# EAGLE board MotorShieldAlternate (EAGLE 7.5.0)
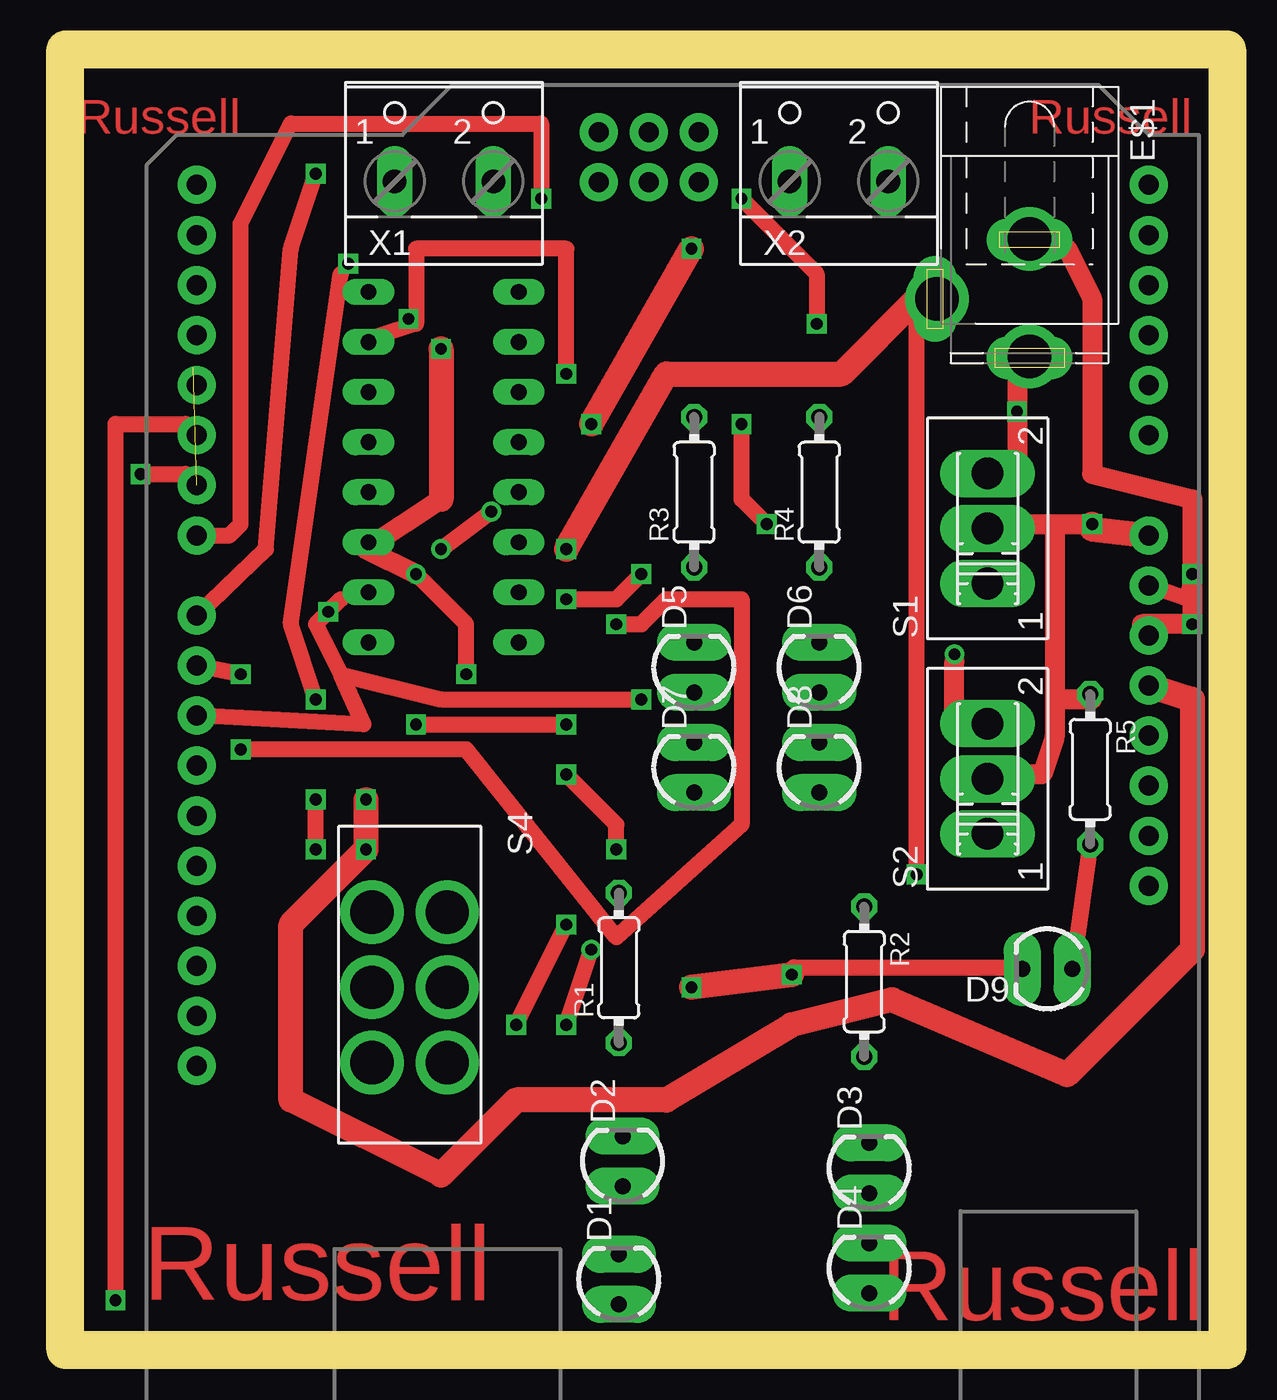
[diagram p0: board, top side]
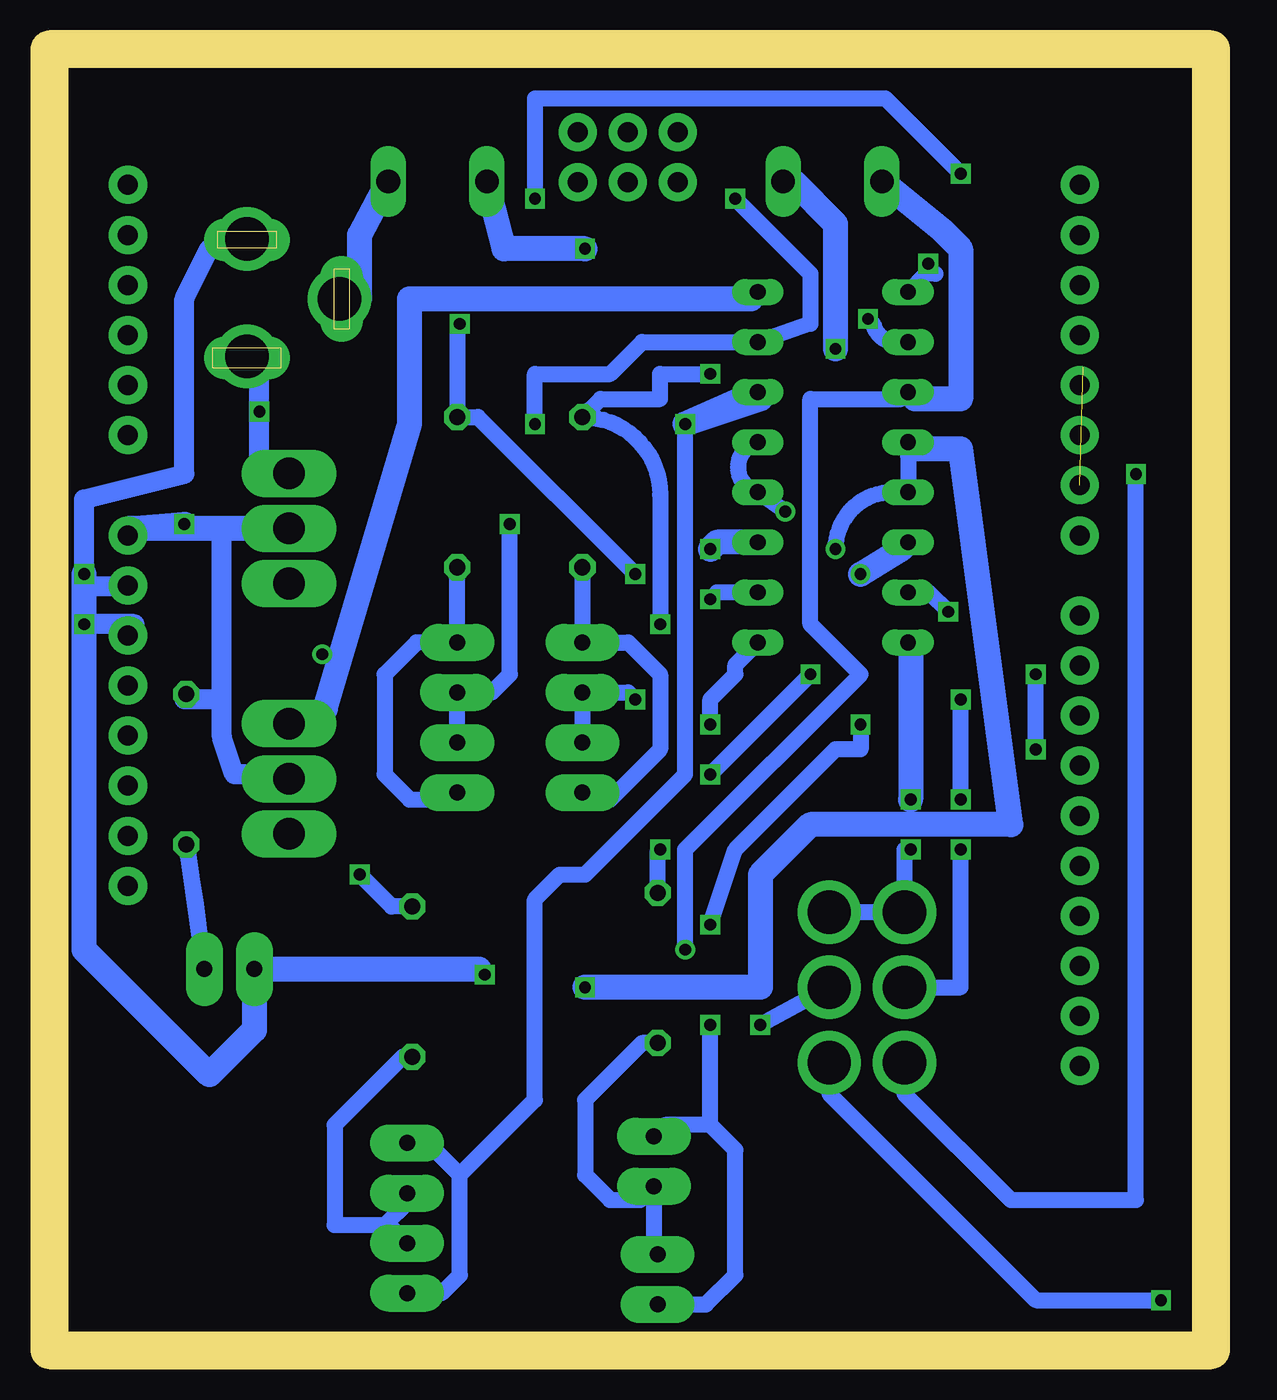
[diagram p1: board, bottom side, seen from below]

Size 58.92 x 66 mm. Coordinates in mm from the lower left corner, seen from the top.
Outline: 0,0 0,66 58.92,66 58.92,0 0,0
Copper layers (1*16): Top 0.035mm / dielectric 1.5mm / Bottom 0.035mm
Design rules "default": minimum track width 10mil, minimum drill 24mil, track to track 8mil, track to pad 8mil, pad to pad 8mil, via to via 8mil, smd to smd 8mil, copper to edge 40mil, drill to drill 8mil, minimum pad ring 10mil, minimum via ring 8mil, stop-mask expansion 4mil, vias tented up to drill 0mil, thermal gap 10mil

## Footprints (pad centres in the part's own frame; a part is rotated, then mirrored left to right if it is on the bottom)
LED3MM = drill 0.813 pad 1.88 long: A -1.27,0; K 1.27,0
5.5-2.5-BARRELCONNECTOR = drill 0.8 pad 2.184 long: 1 -3,0; 2 0,-4.8 | drill 1 pad 2.184 long: 3 3,0 | drill 2.2: P$1 -3.048,0; P$2 2.921,0; P$3 0,-4.699
ARDUINO_R3 = drill 1.016 pad 1.93: 3.3V 35.56,2.54; 5V 38.1,2.54; A0 50.8,2.54; A1 53.34,2.54; A2 55.88,2.54; A3 58.42,2.54; A4 60.96,2.54; A5 63.5,2.54; AREF 23.876,50.8; D0 63.5,50.8; D1 60.96,50.8; D2 58.42,50.8; D3 55.88,50.8; D4 53.34,50.8; D5 50.8,50.8; D6 48.26,50.8; D7 45.72,50.8; D8 41.656,50.8; D9 39.116,50.8; D10 36.576,50.8; D11 34.036,50.8; D12 31.496,50.8; D13 28.956,50.8; GND@1 40.64,2.54; GND@2 43.18,2.54; GND@3 26.416,50.8; GND@4 66.18,25.35; IOREF 30.48,2.54; MISO 63.64,30.43; MOSI 66.18,27.89; NC 27.94,2.54; RESET@1 33.02,2.54; RESET@2 63.64,25.35; SCK 63.64,27.89; SCL 18.796,50.8; SDA 21.336,50.8; VCC 66.18,30.43; VIN 45.72,2.54
0204/7 = drill 0.813 octagon: 1 -3.81,0; 2 3.81,0
SLIDE_SWITCH = drill 1.6 long: 1 -2.794,0; 2 0,0; 3 2.794,0
DUAL_SLIDE_SWITCH = drill 2.2: 1 -3.81,-1.905; 2 0,-1.905; 3 3.81,-1.905; 4 -3.81,1.905; 5 0,1.905; 6 3.81,1.905
DIP16 = drill 0.8 long: P1 -8.89,-3.81; P2 -6.35,-3.81; P3 -3.81,-3.81; P4 -1.27,-3.81; P5 1.27,-3.81; P6 3.81,-3.81; P7 6.35,-3.81; P8 8.89,-3.81; P9 8.89,3.81; P10 6.35,3.81; P11 3.81,3.81; P12 1.27,3.81; P13 -1.27,3.81; P14 -3.81,3.81; P15 -6.35,3.81; P16 -8.89,3.81
2PIN-SCREW-TERMINAL = drill 1.194 long: 1 -2.5,-1.27; 2 2.5,-1.27

## Placement (x,y rotation side)
D1  [LED3MM]  28.07,3.59 90 top
D2  [LED3MM]  28.26,9.59 90 top
D3  [LED3MM]  40.77,9.24 90 top
D4  [LED3MM]  40.77,4.16 90 top
D5  [LED3MM]  31.88,34.64 90 top
D6  [LED3MM]  38.23,34.64 90 top
D7  [LED3MM]  31.88,29.56 90 top
D8  [LED3MM]  38.23,29.56 90 top
D9  [LED3MM]  49.79,19.34 180 top
E$1  [5.5-2.5-BARRELCONNECTOR]  48.89,53.34 270 top
J1  ARDUINO_UNO_R3  [ARDUINO_R3]  57.47,-4.38 90 top
R1  [0204/7]  28.07,19.4 90 top
R2  [0204/7]  40.51,18.7 270 top
R3  [0204/7]  31.88,43.53 90 top
R4  [0204/7]  38.23,43.53 90 top
R5  [0204/7]  51.97,29.47 270 top
S1  [SLIDE_SWITCH]  46.77,41.69 90 top
S2  [SLIDE_SWITCH]  46.77,28.99 90 top
S4  [DUAL_SLIDE_SWITCH]  17.46,18.41 270 top
U$1  MOTOR_DRIVERDIP16  [DIP16]  19.18,44.8 90 top
X1  [2PIN-SCREW-TERMINAL]  19.2,60.57 0 top
X2  [2PIN-SCREW-TERMINAL]  39.23,60.57 0 top

## Library data of the parts
D1-D9 = ISCTRainingProgram; PROD_ID: DIO-08794
E$1 J1 R1-R5 S1 S2 S4 U$1 = ISCTRainingProgram
X1 X2 = ISCTRainingProgram; MPN: 237-102; OC_FARNELL: unknown; OC_NEWARK: 70K9898

## Nets
N$1: R2.1 U$1.P3
N$3: R1.2 U$1.P14 X1.2
N$4: J1.VIN S1.2
N$5: D6.A D8.K J1.D7 U$1.P7
N$6: U$1.P8
N$8: D5.A D7.K J1.D10
N$9: S4.2
N$10: D3.K D4.A U$1.P6 X2.1
N$11: J1.D8 R4.2 U$1.P2
N$12: J1.D9 R3.2
N$13: D9.A R5.2
N$14: J1.D5 S4.6
N$15: S4.5 U$1.P1
N$16: J1.D6 S4.3
N$18: D3.A D4.K R2.2
N$19: D5.K D7.A R3.1
N$20: D1.A D2.K U$1.P11 X1.1
N$21: D1.K D2.A R1.1
N$22: J1.5V S4.1 S4.4 U$1.P16
N$23: D9.K J1.GND@2 U$1.P4 U$1.P5 U$1.P12 U$1.P13
N$24: D6.K D8.A R4.1
S$1: X2.2
S$8: U$1.P15
S$9: U$1.P10
S$12: U$1.P9

## Tracks (layer width: path | path; a pad name or v marks a point on that pad's centre or on a via)
N$1  (via drill 0.6)
  Top 0.813: v43.18,24.13 43.18,53.34
  Top 1.27: v25.4,40.64 30.48,49.53 39.37,49.53 43.18,53.34
  Bottom 0.813: R2.1 41.56,22.51 v43.18,24.13
  Bottom 1.27: U$1.P3 25.05,40.99 v25.4,40.64
N$2  (via drill 0.6)
  Top 1.016: 50.8,55.88 52.07,53.34 52.07,44.45 57.15,43.18 v57.15,36.83 54.61,36.83
  Bottom 1.016: 57.15,38.73 v57.15,36.83 54.61,36.83 | 57.15,38.73 57.15,43.18 52.07,44.45 52.07,53.34 50.8,55.88 | 55.24,38.73 57.15,38.73
N$3  (via drill 0.6)
  Top 0.813: v27.94,25.4 27.94,26.67 v25.4,29.21 | v20.32,34.29 20.32,36.83 v17.78,39.37
  Top 1.016: 19.05,43.18 15.24,40.64 v17.78,39.37
  Top 1.27: v19.05,50.8 19.05,43.18
  Bottom 0.813: R1.2 28.07,25.27 v27.94,25.4 | v25.4,29.21 v20.32,34.29
  Bottom 1.27: v17.78,39.37 15.72,40.64 U$1.P14 | X1.2 21.2,59.3 19.05,57.15 v19.05,50.8
N$4  (via drill 0.6)
  Top 1.016: 50.16,41.91 v52.07,41.91 | 46.99,41.91 50.16,41.91 | 50.16,41.91 50.16,31.11 49.53,29.21 48.26,29.21
  Top 1.27: v52.07,41.91 52.07,41.66 J1.VIN
  Bottom 1.27: S1.2 54.83,41.69 v52.07,41.91
N$5  (via drill 0.6)
  Top 0.813: v35.56,41.91 34.29,43.18 v34.29,46.99 | J1.D7 8.32,41.34 8.89,41.91 8.89,57.15 11.43,62.23 24.13,62.23 v24.13,58.42
  Bottom 0.813: D8.K D6.A 36.48,33.37 35.56,34.29 v35.56,41.91 | v34.29,46.99 34.29,49.53 30.48,49.53 28.86,51.15 U$1.P7 20.32,52.07 20.32,54.61 v24.13,58.42
N$6
  Bottom 1.27: 44.92,32.55 40.64,46.99 40.64,53.34 23.34,53.34 U$1.P8
N$7  (via drill 0.6)
  other vias: 27.94,25.4
N$8  (via drill 0.6)
  Top 0.813: 13.97,38.1 12.7,36.83 13.97,34.29 | 13.97,34.29 15.11,31.75 J1.D10 | v29.21,33.02 19.05,33.02 13.97,34.29
  Bottom 0.813: D7.K D5.A 29.56,33.37 v29.21,33.02
N$9  (via drill 0.6)
  Top 0.813: v12.7,25.4 v12.7,27.94 | v12.7,33.02 11.43,36.83 13.97,54.61
  Bottom 0.813: S4.2 12.7,18.41 v12.7,25.4 | v12.7,27.94 v12.7,33.02
N$10  (via drill 0.6)
  Top 1.27: v26.67,46.99 v31.75,55.88
  Bottom 0.813: 38.1,8.89 39.37,10.16 | 39.37,10.16 40.42,10.16 D3.K 39.72,10.51 39.37,10.16 | D4.A 39.02,2.89 38.1,3.81 38.1,8.89 | 38.1,8.89 34.29,12.7 34.29,22.86 33.02,24.13 31.75,24.13 26.67,29.21 v26.67,46.99
  Bottom 1.27: 22.86,48.26 v26.67,46.99 U$1.P6 | v31.75,55.88 35.85,55.88 X2.1
N$11  (via drill 0.6)
  Top 0.813: v25.4,38.1 27.94,38.1 v29.21,39.37 | J1.D8 10.16,40.64 11.43,55.88 v12.7,59.69 | v34.29,58.42 38.1,54.61 v38.1,52.07
  Bottom 0.813: v29.21,39.37 37.18,47.34 R4.2 38.23,51.94 v38.1,52.07 | U$1.P2 25.05,38.45 v25.4,38.1 | v12.7,59.69 16.51,63.5 34.29,63.5 v34.29,58.42
N$12  (via drill 0.6)
  Top 0.813: v25.4,49.53 25.4,55.88 17.78,55.88 17.78,52.07 15.88,51.44 | v27.94,36.83 29.21,36.83 30.48,38.1 34.29,38.1 34.29,26.67 27.94,20.95 20.32,30.48 v8.89,30.48 | v8.89,34.29 J1.D9
  Bottom 0.813: v25.4,49.53 27.94,49.53 27.94,48.26 30.96,48.26 R3.2 arc90 27.94,43.4 v27.94,36.83 | v8.89,30.48 v8.89,34.29
N$13
  Bottom 0.813: D9.A 51.95,25.65 51.05,19.3 51.47,22.61 R5.2
N$14  (via drill 0.6)
  Top 0.813: v2.54,2.54 2.54,46.99 6.1,46.99 J1.D5
  Bottom 0.813: S4.6 19.37,13.02 8.89,2.54 v2.54,2.54
N$15  (via drill 0.6)
  Top 0.813: v22.86,16.51 v25.4,21.59 | v17.78,31.75 v25.4,31.75
  Bottom 0.813: S4.5 v22.86,16.51 | v25.4,21.59 24.13,25.4 19.05,30.48 17.78,30.48 v17.78,31.75 | v25.4,31.75 25.4,33.02 24.13,34.29 24.13,34.77 U$1.P1
N$16  (via drill 0.6)  (1 unrouted)
  Top 0.813: v3.81,44.45 6.1,44.45 J1.D6
  Bottom 0.813: S4.3 15.55,13.02 10.16,7.62 3.81,7.62 v3.81,44.45
N$18
  Bottom 0.813: R2.2 40.99,14.89 44.45,11.43 44.45,6.35 41.91,6.35 | 41.91,6.35 41.69,6.35 D4.K | D3.A 40.77,7.49 41.91,6.35
N$19
  Bottom 0.813: R3.1 D5.K 29.56,35.91 27.94,34.29 27.94,30.48 30.48,27.94 31.53,27.94 D7.A
N$20  (via drill 0.6)
  Top 0.813: v25.4,16.51 v26.67,20.32
  Bottom 0.813: D1.A 25.62,2.32 24.13,3.81 24.13,10.16 25.4,11.43 | 25.4,11.43 27.69,11.43 D2.K | 25.4,11.43 v25.4,16.51 | v26.67,20.32 26.67,25.4 17.78,34.29 20.32,36.83 20.32,48.26 15.72,48.26 U$1.P11 15.02,48.26
  Bottom 1.27: X1.1 13.58,56.76 12.7,55.88 12.7,48.26 15.02,48.26
N$21
  Bottom 0.813: R1.1 28.86,15.59 31.75,12.7 31.75,8.89 30.48,7.62 28.96,7.62 D2.A 28.26,5.05 D1.K
N$22  (via drill 0.6)
  Top 1.27: v15.24,27.94 v15.24,25.4 11.43,21.59 11.43,12.7 19.05,8.89 22.86,12.7 30.48,12.7 36.83,16.51 41.91,17.78 50.8,13.97 57.15,20.32 57.15,33.02 J1.5V
  Bottom 0.813: U$1.P16 15.24,35.91 | v15.24,25.4 15.55,25.4 S4.1 19.05,22.22 19.05,22.86 19.37,22.86 S4.4
  Bottom 1.27: 15.24,35.91 v15.24,27.94
N$23  (via drill 0.6)
  Top 0.813: v57.15,39.37 56.9,38.1 J1.GND@2 | v19.05,40.64 v21.59,42.55
  Top 1.27: v36.83,19.05 v31.75,18.41
  Bottom 0.813: 37.12,19.34 v36.83,19.05 | 15.02,45.72 15.37,45.37 U$1.P13 16.16,43.53 arc-90 v19.05,40.64 | v21.59,42.55 U$1.P4 arc152 U$1.P5
  Bottom 1.27: 37.12,19.34 D9.K 48.52,16.25 50.8,13.97 57.15,20.32 v57.15,39.37 | U$1.P12 15.02,45.72 12.7,45.72 10.16,26.67 20.32,26.67 22.86,24.13 22.86,18.41 v31.75,18.41
N$24
  Bottom 0.813: D8.A 38.58,27.94 40.64,27.94 41.91,29.21 41.91,34.29 40.29,35.91 D6.K R4.1
N$27  (via drill 0.6)
  other vias: 43.18,24.13
N$29  (via drill 0.6)
  other vias: 25.4,40.64
N$30  (via drill 0.6)
  other vias: 13.34,37.47
N$31  (via drill 0.6)
  other vias: 29.21,33.02
N$32  (via drill 0.6)
  other vias: 25.4,38.1
N$33  (via drill 0.6)
  other vias: 25.4,31.75
N$34  (via drill 0.6)
  other vias: 15.24,25.4
N$35  (via drill 0.6)
  other vias: 12.7,27.94
N$36  (via drill 0.6)
  other vias: 14.35,55.12
N$37  (via drill 0.6)
  other vias: 34.29,46.99
N$38  (via drill 0.6)
  other vias: 17.4,52.32
N$39  (via drill 0.6)
  other vias: 22.86,16.51
S$1
  Bottom 1.27: X2.2 43.18,56.58 43.18,53.34
S$2  (via drill 0.6)
  Top 1.016: 48.26,49.53 v48.26,47.62 48.26,44.45
  Bottom 1.016: 48.26,44.45 v48.26,47.62 48.26,49.53
S$3
  Bottom 1.016: 50.8,33.02 52.07,33.02
S$4
  Bottom 1.016: 48.26,29.21 49.53,29.21 50.16,31.11 50.16,41.27
S$5
  Top 1.016: 52.07,33.02 50.8,33.02
S$6  (via drill 0.6)
  other vias: 45.08,35.31
S$7
  Top 1.016: 45.08,32.38 45.08,34.92
S$8
  Bottom 0.813: U$1.P15 14.32,38.45 13.34,37.47
S$9
  Bottom 0.813: 17.14,52.07 arc-90 15.59,51.15 U$1.P10
S$10
  Top 0.813: 51.94,25.53 51.05,19.18
S$11
  Top 0.813: 36.96,19.43 47.75,19.43
S$12
  Bottom 0.813: 13.97,54.61 14.45,54.61 U$1.P9

## Text on the board
Top: Russell | Russell | Russell | Russell